# Altium PCB PCB_Byb2Aver2.PcbDoc
Units mm, origin at the board's own origin, x right, y up, seen from the top; angles counter-clockwise.
Board outline 125.25 x 82.75 mm, 2 copper layers (Top Layer, Bottom Layer), stack 2.071 mm thick; 73 components, 29 nets, 142 pads, 36 vias.
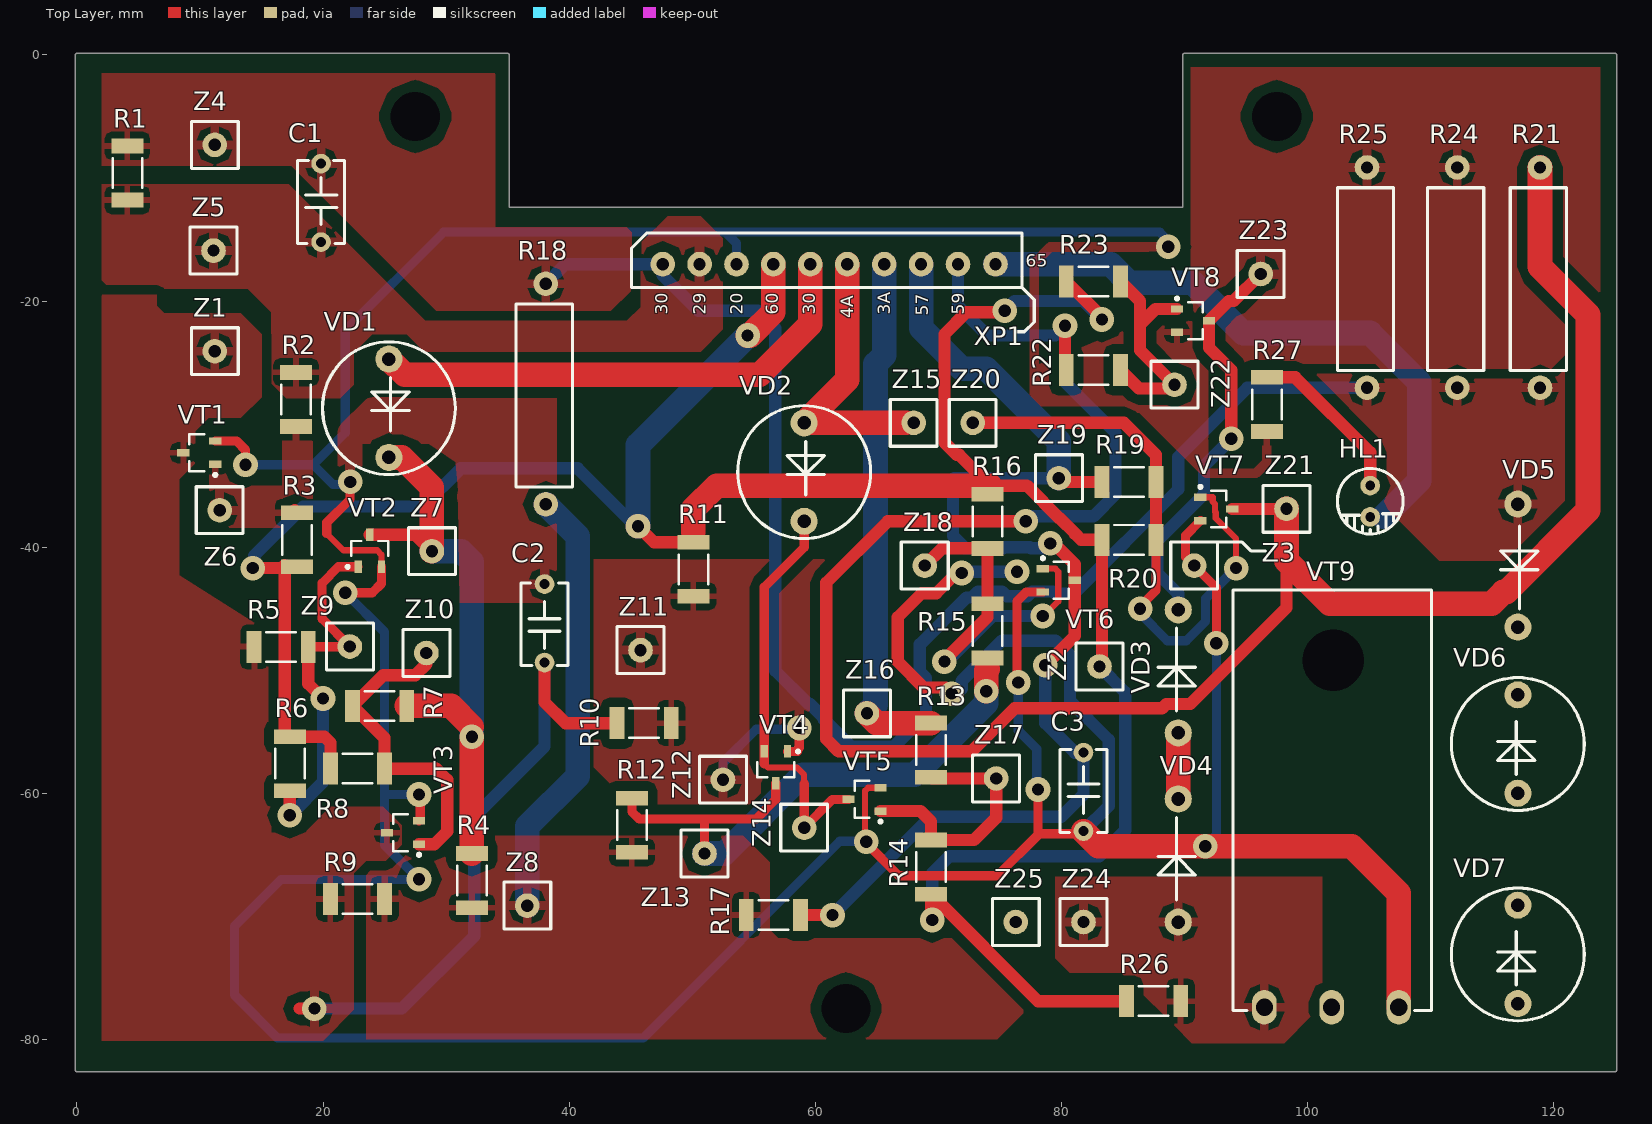
[diagram p0: Top Layer view]
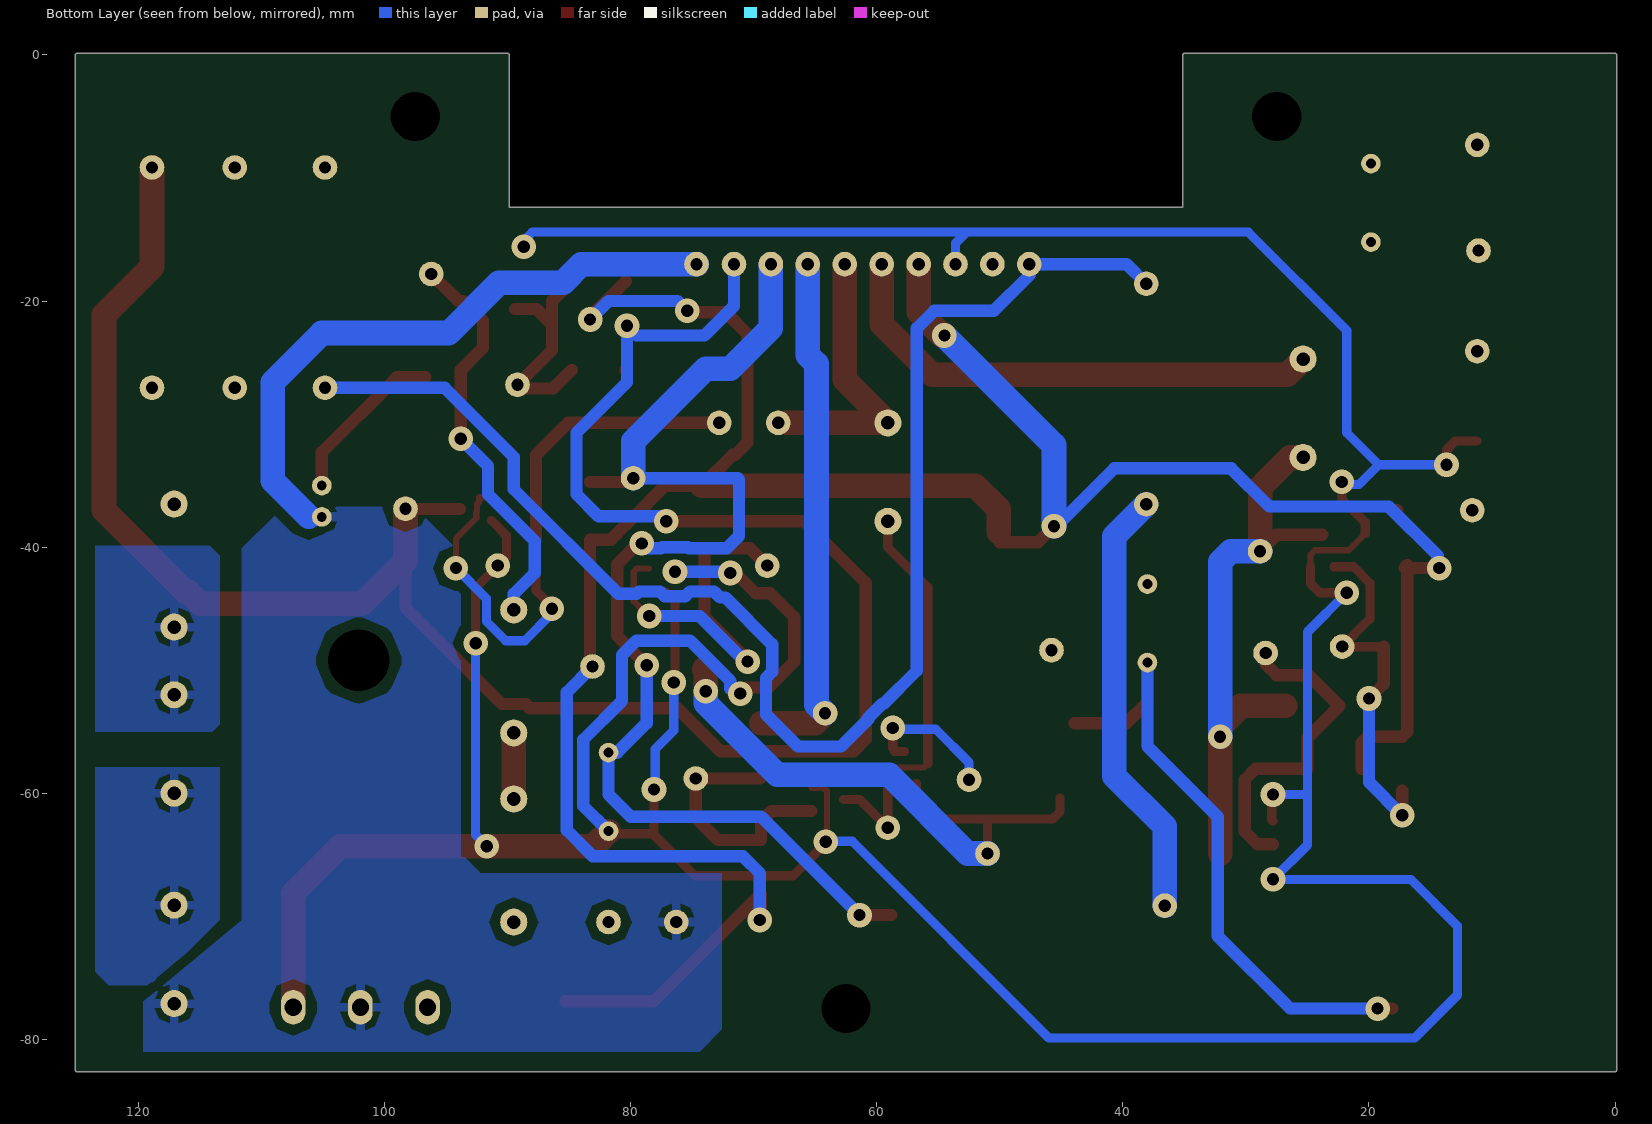
[diagram p1: Bottom Layer view, seen from below]
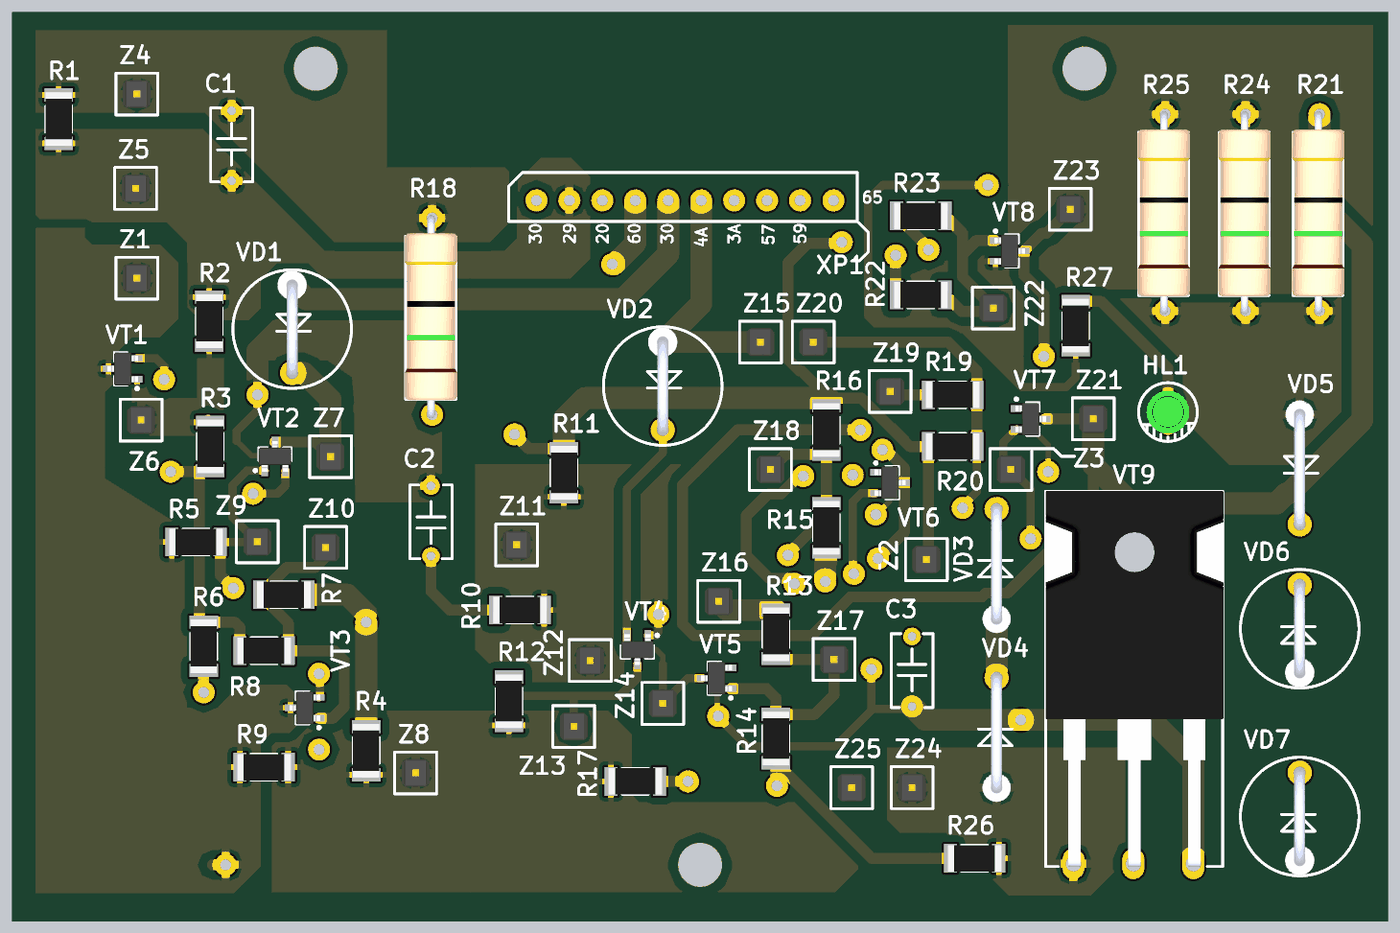
[diagram p2: 3D render of the assembled board from above, using the file's embedded part models]

## Layer stack, top to bottom
Top Solder: solder mask 0.0102, Solder Resist, Dk 3.5
Top Layer: signal copper 0.0356
Dielectric 1: dielectric 2, FR-4, Dk 4.8
Bottom Layer: signal copper 0.0356
Bottom Solder: solder mask 0.0102, Solder Resist, Dk 3.5

## Board outline
-0.117,-82.45 cw(c0,-82.4) -0.127,-82.4 -0.127,0 cw(c0,0) 0,0.127 35,0.127 cw(c35,0) 35.127,0 35.127,-12.373 89.873,-12.373 89.873,-0.001 cw(c90,0) 90,0.127 125,0.127 cw(c125,0) 125.127,0 125.127,-82.5 cw(c125,-82.5) 125,-82.627 0,-82.627 cw(c0,-82.5)

## Design rules (kind name [scope] priority, off if disabled: settings)
Clearance [All] p1: gap=0.5 ignorepadtopadclearanceinfootprint=FALSE except(0: Arc-Hole Track-Hole SMDPad-Hole THPad-Hole Via-Hole Fill-Hole Poly-Hole Region-Hole Text-Hole; 0.3: Arc-Track Arc-SMDPad Track-Track SMDPad-SMDPad; 0.75: Arc-THPad Arc-Poly Arc-Region Track-THPad Track-Poly Track-Region SMDPad-THPad SMDPad-Poly SMDPad-Region THPad-THPad THPad-Poly THPad-Region Via-Poly Via-Region Fill-Poly Fill-Region Poly-Poly Poly-Region Region-Region; 1: THPad-Via)
ComponentClearance [All] p1: gap=0.5 collisioncheckmode=3 verticalgap=0.5 showdistances=FALSE
PlaneClearance [All] p1: clearance=0.75
PlaneConnect [All] p1: planeconnectstyle=Relief reliefexpansion=0.75 reliefentries=4 reliefconductorwidth=0.5 reliefairgap=0.5
PolygonConnect [All] p1: thpad.connectstyle=Relief thpad.reliefconductorwidth=0.75 thpad.reliefentries=4 thpad.polygonreliefangle="90 Angle" thpad.airgapwidth=0.5 smdpad.connectstyle=Relief smdpad.reliefconductorwidth=0.5 smdpad.reliefentries=4 smdpad.polygonreliefangle="90 Angle" smdpad.airgapwidth=0.5 via.connectstyle=Relief via.reliefconductorwidth=0.75 via.reliefentries=4 via.polygonreliefangle="90 Angle" via.airgapwidth=0.5
RoutingVias [All] p1: holewidth=1 width=2 viastyle="Through Hole" minholewidth=1 minwidth=2 maxholewidth=1 maxwidth=2
SMDEntry [All] p1: side=TRUE corner=TRUE anyangle=TRUE
SMDToCorner [All] p1: distance=196850
SolderMaskExpansion [All] p1: expansion=0.2
Width [All] p1: maxlimit=4 minlimit=0.5 preferedwidth=2
27 further rules are at their usual default settings.

## Components (designator, comment, footprint, x,y, rotation, side; value= is the part's Value field where it differs from the comment)
C1 "Capasitor" CAPASITOR 19.844,-8.833 r270 top value=0.25uF
C2 "Capasitor" CAPASITOR 38,-49.38 r90 top value=0.25uF
C3 "Capasitor" CAPASITOR 81.8,-56.7 r270 top value=0.25uF
HL1 "Led" GNLR 105.1,-35 r270 top
R1 "Resistor_1/2W" RESC5025L 4.096,-9.595 r90 top value=470
R2 "Resistor_1/2W" RESC5025L 17.8,-28 r90 top value=1k2
R3 "Resistor_1/2W" RESC5025L 17.9,-39.4 r90 top value=680
R4 "Resistor_1/2W" RESC5025L 32.1,-67.1 r270 top value=820
R5 "Resistor_1/2W" RESC5025L 16.6,-48.1 r180 top value=820
R6 "Resistor_1/2W" RESC5025L 17.304,-57.601 r270 top value=3k9
R7 "Resistor_1/2W" RESC5025L 24.6,-52.9 r0 top value=820
R8 "Resistor_1/2W" RESC5025L 22.8,-58 r0 top value=3k9
R9 "Resistor_1/2W" RESC5025L 22.8,-68.6 r0 top value=820
R10 "Resistor_1/2W" RESC5025L 46.1,-54.3 r180 top value=820
R11 "Resistor_1/2W" RESC5025L 50.1,-41.8 r270 top value=3k9
R12 "Resistor_1/2W" RESC5025L 45.1,-62.6 r270 top value=820
R13 "Resistor_1/2W" RESC5025L 69.4,-56.5 r90 top value=820
R14 "Resistor_1/2W" RESC5025L 69.4,-66 r90 top value=3k9
R15 "Resistor_1/2W" RESC5025L 74,-46.8 r270 top value=820
R16 "Resistor_1/2W" RESC5025L 74,-37.9 r270 top value=3k9
R17 "Resistor_1/2W" RESC5025L 56.6,-69.9 r180 top value=820
R18 "Resistor_1/2W" RESISTOR_2W 38.227,-9.456 r270 top value=220
R19 "Resistor_1/2W" RESC5025L 85.5,-34.7 r180 top value=560
R20 "Resistor_1/2W" RESC5025L 85.5,-39.4 r0 top value=3k3
R21 "Resistor_1/2W" RESISTOR_2W 119.027,0 r270 top value=560
R22 "Resistor_1/2W" RESC5025L 82.6,-25.6 r180 top value=560
R23 "Resistor_1/2W" RESC5025L 82.6,-18.4 r0 top value=3k3
R24 "Resistor_1/2W" RESISTOR_2W 112.3,0 r270 top value=560
R25 "Resistor_1/2W" RESISTOR_2W 104.97,0 r270 top value=560
R26 "Resistor_1/2W" RESC5025L 87.5,-76.9 r0 top value=560
R27 "Resistor_1/2W" RESC5025L 96.7,-28.4 r90 top value=3k3
VD1 "Diode" DO-41-VERTICAL 25.356,-24.712 r270 top
VD2 "Diode" DO-41-VERTICAL 59.1,-29.9 r270 top
VD3 "Diode" DO-15-VERTICAL 89.5,-55.1 r90 top
VD4 "Diode" DO-15-VERTICAL 89.5,-70.468 r90 top
VD5 "Diode" DO-15-VERTICAL 117.1,-36.5 r270 top
VD6 "stabilizater" DO-41-VERTICAL 117.1,-60 r90 top
VD7 "stabilizater" DO-41-VERTICAL 117.1,-77.1 r90 top
VT1 "Bipolar Transistor" SOT95P270X110-3N 9.938,-32.328 r180 top
VT2 "Bipolar Transistor" SOT95P270X110-3N 23.8,-40.3 r90 top
VT3 "Bipolar Transistor" SOT95P270X110-3N 26.5,-63.2 r180 top
VT4 "Bipolar Transistor" SOT95P270X110-3N 56.8,-57.9 r270 top
VT5 "Bipolar Transistor" SOT95P270X110-3N 64,-60.5 r180 top
VT6 "Bipolar Transistor" SOT95P270X110-3N 79.8,-42.7 r0 top
VT7 "Bipolar Transistor" SOT95P270X110-3N 92.6,-36.9 r0 top
VT8 "Bipolar Transistor" SOT95P270X110-3N 90.7,-21.6 r0 top
VT9 "2sb688" TO-247-3 96.5,-77.4 r0 top
XP1 "Connector" CONNECTOR 47.6,-17 r0 top
Z1 "point_control" POINT_CONTROL 11.208,-24.073 r0 top
Z2 "point_control" POINT_CONTROL 83.1,-49.7 r0 top
Z3 "point_control" POINT_CONTROL 90.8,-41.5 r0 top
Z4 "point_control" POINT_CONTROL 11.208,-7.309 r0 top
Z5 "point_control" POINT_CONTROL 11.1,-15.9 r0 top
Z6 "point_control" POINT_CONTROL 11.6,-37 r0 top
Z7 "point_control" POINT_CONTROL 28.849,-40.332 r0 top
Z8 "point_control" POINT_CONTROL 36.6,-69.132 r0 top
Z9 "point_control" POINT_CONTROL 22.181,-48.079 r0 top
Z10 "point_control" POINT_CONTROL 28.4,-48.6 r0 top
Z11 "point_control" POINT_CONTROL 45.8,-48.368 r0 top
Z12 "point_control" POINT_CONTROL 52.5,-58.9 r0 top
Z13 "point_control" POINT_CONTROL 51,-64.9 r0 top
Z14 "point_control" POINT_CONTROL 59.1,-62.8 r0 top
Z15 "point_control" POINT_CONTROL 68,-29.9 r0 top
Z16 "point_control" POINT_CONTROL 64.2,-53.5 r0 top
Z17 "point_control" POINT_CONTROL 74.7,-58.8 r0 top
Z18 "point_control" POINT_CONTROL 68.9,-41.5 r0 top
Z19 "point_control" POINT_CONTROL 79.8,-34.4 r0 top
Z20 "point_control" POINT_CONTROL 72.8,-29.9 r0 top
Z21 "point_control" POINT_CONTROL 98.3,-36.882 r0 top
Z22 "point_control" POINT_CONTROL 89.2,-26.8 r0 top
Z23 "point_control" POINT_CONTROL 96.2,-17.8 r0 top
Z24 "point_control" POINT_CONTROL 81.8,-70.468 r0 top
Z25 "point_control" POINT_CONTROL 76.3,-70.468 r0 top

## Footprints (in the part's own frame and the unit in brackets; to place one, negate y for a bottom-side part, rotate by r counter-clockwise, add the part's x,y. Pads: shape width x height; smd on the part's side, far side on the other; paste and mask are expansions set on the pad)
CAPASITOR [mm]
  round 1.6 hole 0.8: 1(0,0) 2(6.38,0)
  silkscreen extent -0.25,-1.91 6.48,1.91, body extent -0.32,-2.93 6.58,2.98, height 7.17
CONNECTOR [mm]
  round 2 hole 1: 1(0,0) 2(3,0) 3(6,0) 4(9,0) 5(12,0) 6(15,0) 7(18,0) 8(21,0) 9(24,0) 10(27.051,0)
  silkscreen extent -2.54,-1.91 29.21,2.54
DO-15-VERTICAL [mm]
  round 2.2 hole 1.1: 1(0,0) 2(10,0)
  silkscreen extent 1.78,-1.4 8.51,1.65, body extent -1.3,-1.3 10.5,1.3, height 8.38
DO-41-VERTICAL [mm]
  round 2.2 hole 1.1: 1(0,0) 2(8,0)
  silkscreen extent -1.4,-5.4 9.4,5.4, body extent -1.35,-1.35 8.5,1.35, height 12.1
GNLR [mm]
  round 1.6 hole 0.8: 1(0,0) 2(2.54,0)
  silkscreen extent -1.4,-2.67 3.94,2.67, body extent -0.68,-1.95 3.22,1.95, height 8
POINT_CONTROL [mm]
  round 2 hole 1: 1(0,0)
  silkscreen extent -1.91,-1.91 1.91,1.91, body extent -1.27,-1.27 1.27,1.27, height 10
RESC5025L [mm] "Chip Resistor, Body 5.0x2.5mm, IPC High Density"
  rect 1.2x2.6 smd: 1(-2.2,0) 2(2.2,0)
  silkscreen extent -1.2,-1.2 1.2,1.2, body extent -2.45,-1.2 2.45,1.2, height 0.55
RESISTOR_2W [mm]
  round 2 hole 1: 1(9.144,-0.127) 2(27.051,-0.127)
  silkscreen extent 10.79,-2.54 25.65,2.03, body extent 8.89,-2.62 27.38,2.16, height 5.02
SOT95P270X110-3N [mm] "SOT23, 3-Leads, Body 2,95x2,70mm, Pitch 0,95mm, IPC Medium Density"
  rect 1x0.6 smd: 1(-1.3,-0.95) 2(-1.3,0.95) 3(1.3,0)
  silkscreen extent -1.43,-1.5 0.8,1.92, body extent -1.4,-1.5 1.4,1.5, height 1.1
TO-247-3 [mm]
  oval 2x2.8 hole 1.4: 1(0,0) 2(5.46,0) 3(10.92,0)
  silkscreen extent -2.54,-0.25 13.59,33.91, body extent -2.54,-0.25 13.66,33.95, height 5.5

## Part data
C2 C3: Voltage=160B, Marka=ELM
HL1: Color=Green, Marka=АЛ-203
R1 R18 R21 R24 R25: package=5020, Power=2W
  R1: Marka=RES2010
  R18 R21 R24 R25: Marka=R2010
R2 R3: Power=0.5W
R4 R5 R6 R7 R8 R9 R10 R11 R12: package=2010, Power=0.5W
  R4: Marka=R5025
  R5 R7: Marka=R5020
  R6: Marka=RE5020
  R8 R9 R10 R11 R12: Marka=RES5020
R13 R14 R15 R16 R17 R19 R20 R22 R23 R26 R27: package=5020, Power=0.5W, Marka=R2010
VD1 VD2 VD6 VD7: package=DO-41
  VD1 VD2: Marka=HER105
  VD6 VD7: Marka=BZx85
VD3 VD4 VD5: package=DO-15, Marka=SF-28
VT1: package=SoT-323, Marka=2SB1198
VT2 VT3: package=SOT-323, Marka=2SB1198
VT4 VT6 VT7 VT8: package=Sot-323, Marka=2SB1198
VT5: package=sot-323, Marka=2SB1198
VT9: package=TO-247, Marka=2SB688
C1: Marka=EMN1223

## Free pads (board coordinates)
  round 0 hole 4: 0(27.5,-5) 0(97.5,-5) 3(62.5,-77.5)
  round 0 hole 5: 0(102.1,-49.2)

## Via types
v1: diameter 2, hole 1, Top Layer to Bottom Layer, 36 vias

## Nets (pads, with @x,y where several pads share a name; then routed paths per layer and width w, separated by ;. In a path a pad name is that pad's centre, name@x,y a point inside that pad or via, vN(x,y) a via of type N, cw(c..) or ccw(c..) an arc to the next point about the centre after c; other vN are vias at no path point)
20: C2.2 C3.2 R27.1 VT1.1 VT2.1 VT3.1 VT5.1 VT6.1 VT7.1 VT8.1 VT9.3 XP1.3 Z3.1 | length 392.2
  Top Layer w0.5: 20.3,-38.9 21.65,-40.25 24.4,-40.25 24.75,-40.6 VT2.1 ; v1@64.1,-64 64.05,-63.95 64.05,-59.8 64.3,-59.55 VT5.1
  Top Layer w0.75: VT1.1 12.978,-31.378 13.7,-32.1 v1(13.7,-33.3) ; 20.3,-38.9 20.3,-38 22.2,-36.1 v1(22.2,-34.7) ; v1@22.151,-43.349 v1(21.8,-43.7) 24,-43.7 24.75,-42.95 VT2.1 ; VT3.1 27.9,-62.15 27.9,-60 v1(27.8,-60.1) ; v1@64.05,-63.95 v1(64.15,-63.95) ; v1@64.1,-64 66.8,-66.7 74.8,-66.7 78.15,-63.35 78.1,-63.3 ; v1(76.5,-51) 76.4,-50.9 76.4,-44.4 77.15,-43.65 VT6.1 ; v1(78.1,-59.7) 78.1,-63.3 ; C3.2 81.58,-63.3 78.1,-63.3 ; VT7.1 90.1,-39.05 90.1,-40.8 Z3.1 92.6,-43.3 v1(92.6,-47.8) ; v1(91.7,-64.3) v1@91.8,-64.3
  Top Layer w1: v1(71.1,-51.9) 70.6,-51.4 68.8,-51.4 66.7,-49.3 66.7,-45.7 68.65,-43.75 69.832,-43.75 71.382,-42.2 71.6,-42.2 71.7,-42.1 v1(71.9,-42.1) ; v1(76.4,-42) v1@76.65,-41.75
  Top Layer w2: C3.2 83.02,-64.3 v1(91.7,-64.3) ; v1@91.8,-64.3 103.6,-64.3 107.42,-68.12 VT9.3
  Bottom Layer w0.75: v1(13.7,-33.3) 19.2,-33.3 ; v1(21.8,-43.7) 25,-46.9 25,-60.1 ; v1(22.2,-34.7) 22.4,-34.9 20.8,-34.9 19.2,-33.3 ; v1(27.8,-60.1) 25,-60.1 ; XP1.3 53.6,-15.3 52.7,-14.4 ; v1(64.15,-63.95) 64.2,-63.9 62,-63.9 46,-79.9 16.3,-79.9 12.8,-76.4 12.8,-70.8 16.6,-67 v1(27.8,-67) 25,-64.2 25,-60.1 ; v1(76.5,-51) 76.5,-54.9 78,-56.4 78,-59.6 v1(78.1,-59.7) ; v1(88.7,-15.6) 89.2,-15.6 88,-14.4 52.7,-14.4 ; v1(91.7,-64.3) 92.6,-63.4 v1(92.6,-47.8) ; 19.2,-33.3 21.8,-30.7 21.8,-22.4 29.8,-14.4 52.7,-14.4
  Bottom Layer w1: v1(71.1,-51.9) 71.5,-51.9 71.9,-51.5 71.9,-50.872 75.172,-47.6 79.528,-47.6 80.7,-48.772 80.7,-52.5 83.85,-55.65 83.85,-61.03 C3.2 ; v1(71.9,-42.1) 72.2,-41.8 72.4,-42 v1(76.4,-42)
29: C1.2 R1.1 R2.2 XP1.2 Z5.1
30: C1.1 R1.2 R18.1 R21.2 R24.2 R25.2 VD5.1 XP1.1 Z4.1 | length 118.7
  Bottom Layer w1: R18.1 39.7,-17 XP1.1 47.6,-17.9 50.5,-20.8 55.328,-20.8 56.75,-22.222 56.75,-50.05 59.4,-52.7 59.528,-52.7 60.7,-53.872 60.7,-54 62.9,-56.2 66.4,-56.2 69,-53.6 69,-50.628 68.5,-50.128 68.5,-47.9 72.3,-44.1 72.728,-44.1 73.229,-43.6 75.171,-43.6 75.571,-44 77.228,-44 77.628,-43.6 79.328,-43.6 79.528,-43.8 81,-43.8 89.5,-35.3 89.5,-32.672 95.121,-27.051 R25.2
40: R4.2 R9.2 R12.2 R17.2 R18.2 Z8.1 | length 35.4
  Bottom Layer w2: Z8.1 36.6,-62.7 40.693,-58.607 40.693,-39.1 R18.2
45: R2.1 R3.2 VT1.2 Z6.1 | length 0.8
  Top Layer w1: Z6.1@11.238,-36.638 Z6.1 ; R3.2@17.7,-37 R3.2
46: R5.1 R6.2 VT2.2 Z9.1 | length 30.3
  Top Layer w0.75: R5.1 22.16,-48.1 Z9.1 19.925,-45.823 19.925,-42.923 21.248,-41.6 VT2.2
  Top Layer w1: v1(17.304,-61.796) R6.2 ; R5.1 18.8,-51.1 v1(20,-52.3)
  Bottom Layer w1: v1(17.304,-61.796) 20,-59.1 v1(20,-52.3)
47: R4.1 R7.2 VD1.2 VT2.3 Z7.1 | length 48.6
  Top Layer w1: VT2.3 27.517,-39 Z7.1
  Top Layer w2: VD1.2 26.412,-32.712 28.849,-35.149 Z7.1 ; R7.2 30.4,-52.9 v1@32.1,-54.6 ; R4.1 v1(32.1,-55.4)
  Bottom Layer w2: Z7.1 31.232,-40.332 32.1,-41.2 v1(32.1,-55.4)
48: R7.1 R8.2 VT3.2 Z10.1 | length 26.9
  Top Layer w1: VT3.2 29.05,-64.15 30.1,-63.1 30.1,-58.9 29.2,-58 R8.2 25,-55.5 R7.1 24.9,-50.4 27.5,-50.4 28.4,-49.5 Z10.1
50: C2.1 R5.2 R9.1 R10.2 VT1.3 VT3.3 Z1.1 | length 51
  Top Layer w1: 18.1,-77.5 v1(19.3,-77.5) ; C2.1 38,-52.6 39.7,-54.3 R10.2
  Bottom Layer w1: v1(19.3,-77.5) 26.4,-77.5 32.3,-71.6 32.3,-61.9 38,-56.2 C2.1
51: R10.1 R11.2 VT4.2 Z11.1 Z12.1 | length 11.5
  Top Layer w0.75: VT4.2 58.55,-56.6 58.55,-56.45 58.7,-56.3 v1(58.7,-54.7)
  Bottom Layer w0.75: Z12.1 52.5,-57.5 55.2,-54.8 58.6,-54.8 v1(58.7,-54.7)
52: VD2.2 VT4.1 VT5.3 Z14.1 | length 33.5
  Top Layer w0.5: 55.85,-57.6 56.15,-57.9 58.5,-57.9 59.1,-58.5 59.1,-59.238
  Top Layer w0.75: 55.85,-57.6 VT4.1 55.85,-43.25 59.1,-40 VD2.2 ; 59.1,-59.238 Z14.1 61.4,-60.5 VT5.3
53: R12.1 R15.2 VT4.3 Z13.1 | length 48.6
  Top Layer w0.75: R12.1 45.1,-61.5 45.7,-62.1 50.9,-62.1 ; Z13.1 51,-62.2 50.9,-62.1 ; VT4.3 56.8,-60.5 55.2,-62.1 50.9,-62.1
  Top Layer w2: v1(73.9,-51.7) 73.9,-50 74,-49.9
  Bottom Layer w2: Z13.1 52.6,-64.9 59,-58.5 68.1,-58.5 73.9,-52.7 v1(73.9,-51.7)
56: R15.1 R16.2 VT6.2 Z18.1 | length 31.4
  Top Layer w0.5: v1(78.5,-45.6) 78.561,-45.6 79.75,-44.411 79.75,-42 79.5,-41.75 VT6.2
  Top Layer w1: Z18.1 70.3,-40.1 R16.2 R15.1 74,-45.686 70.5,-49.186 v1(70.5,-49.3)
  Bottom Layer w1: v1(70.5,-49.3) 70.7,-49.3 74.4,-45.6 v1(78.5,-45.6)
57: C3.1 R17.1 R19.2 VT6.3 XP1.8 Z19.1 | length 100
  Top Layer w1: R17.1 v1(61.4,-69.9) ; v1(78.7,-49.6) 81.1,-47.2 VT6.3 81.1,-41.4 79.4,-39.7 v1(79.1,-39.7) ; Z19.1 80.1,-34.7 R19.2
  Bottom Layer w1: v1(61.4,-69.9) 69.4,-61.9 80,-61.9 81.8,-60.1 C3.1 81.1,-56.7 78.7,-54.3 v1(78.7,-49.6) ; v1(79.1,-39.7) 79.1,-40.1 77.528,-40.1 77.428,-40 75.372,-40 75.272,-40.1 72.2,-40.1 71.2,-39.1 71.2,-34.5 71.3,-34.4 Z19.1
  Bottom Layer w2: XP1.8 68.6,-22.2 71.9,-25.5 73.9,-25.5 79.8,-31.4 Z19.1
58: R19.1 R20.2 VT7.2 Z20.1 | length 49.2
  Top Layer w0.5: VT7.2 92.3,-35.95 92.3,-36.3 92.5,-36.5 92.5,-37.139 92.55,-37.189 92.55,-37.65 94.2,-39.3 v1(94.2,-41.7)
  Top Layer w0.75: v1(86.4,-45) 86.4,-44.8 87.7,-43.5 R20.2
  Top Layer w1: Z20.1 85.1,-29.9 87.7,-32.5 R19.1 R20.2
  Bottom Layer w0.75: v1(86.4,-45) 86.4,-45.4 88.6,-47.6 90.147,-47.6 91.725,-46.022 91.725,-44.175 v1(94.2,-41.7)
59: R21.1 R22.2 VT7.3 XP1.9 Z21.1 | length 185.3
  Top Layer w1: v1(77.1,-37.9) 65.9,-37.9 60.9,-42.9 60.9,-55.6 61.9,-56.6 72.7,-56.6 76.2,-53.1 88.177,-53.1 88.527,-52.75 90.478,-52.75 98.3,-44.928 98.3,-41.1 ; v1(80.3,-22) 80.3,-25.5 R22.2 ; VT7.3 98.282,-36.9 Z21.1
  Top Layer w2: Z21.1 98.3,-41.1 101.8,-44.6 114.969,-44.6 115.919,-43.65 116.15,-43.65 122.8,-37 122.8,-21.1 118.9,-17.2 R21.1
  Bottom Layer w1: XP1.9 71.6,-20.4 74,-22.8 79.5,-22.8 v1(80.3,-22) 80.3,-26.6 84.4,-30.7 84.4,-35.7 82.6,-37.5 77.5,-37.5 v1(77.1,-37.9)
60: R3.1 R6.1 R8.1 R11.1 R14.1 R16.1 R20.1 R23.1 R26.1 XP1.4 Z2.1 | length 228.5
  Top Layer w1: v1(14.3,-41.7) R3.1@16.9,-41.7 ; R8.1 20.6,-55.9 20.101,-55.401 R6.1 16.9,-54.997 R3.1@16.9,-41.7 ; v1(45.6,-38.3) 46.9,-39.6 R11.1@50,-39.6 ; v1(69.5,-70.3) 69.4,-70.2 R14.1 78.1,-76.9 R26.1 ; v1(75.4,-20.8) 75.3,-20.9 72.3,-20.9 70.5,-22.7 70.5,-31.5 71.5,-32.5 71.7,-32.5 74.2,-35 77.2,-35 79.9,-37.7 79.928,-37.7 81.1,-38.871 81.1,-38.9 81.6,-39.4 R20.1 83.3,-49.5 Z2.1 ; R23.1 83.3,-21.3 v1(83.3,-21.5) ; R3.1@16.9,-41.7 17.117,-41.7 16.9,-41.483 R3.1@16.9,-41.7
  Top Layer w2: 50.1,-38.8 50.1,-36.9 52,-35 74.2,-35 ; v1(54.5,-22.8) 54.7,-22.8 56.6,-20.9 XP1.4
  Bottom Layer w1: v1(14.3,-41.7) 14.4,-41.6 14.4,-40.7 18.4,-36.7 28.1,-36.7 31.2,-33.6 40.7,-33.6 45.4,-38.3 v1(45.6,-38.3) ; v1(69.5,-70.3) 69.5,-66.5 70.87,-65.13 83.07,-65.13 85.2,-63 85.2,-51.8 Z2.1 ; v1(75.4,-20.8) 76.2,-20 81.8,-20 v1(83.3,-21.5)
  Bottom Layer w2: v1(45.6,-38.3) 45.6,-31.7 v1(54.5,-22.8)
61: R22.1 R23.2 VT8.2 Z22.1 | length 18.9
  Top Layer w1: R22.1 86.3,-27.1 88.9,-27.1 Z22.1 86.4,-24 86.4,-21.9 ; R23.2 86.4,-20 86.4,-21.9 ; VT8.2 87.65,-20.65 86.4,-21.9
62: R24.1 R25.1 VD3.2 VT8.3 Z23.1 | length 33.2
  Top Layer w1: v1(93.8,-31.2) 93.8,-25.6 92,-23.8 VT8.3 93.6,-20 94,-20 Z23.1
  Bottom Layer w1: VD3.2 89.5,-43.8 87.8,-42.1 87.8,-39.5 91.6,-35.7 91.6,-33.4 v1(93.8,-31.2)
63: R26.2 VD4.1 VT9.1 Z24.1
65: HL1.2 VD7.1 VT9.2 XP1.10 Z25.1 | length 51.8
  Bottom Layer w1: HL1.2 106.166,-37.54 106.34,-37.54
  Bottom Layer w2: XP1.10 84,-17 85.5,-18.5 90.7,-18.5 94.8,-22.6 105.1,-22.6 109.1,-26.6 109.1,-34.606 106.166,-37.54
NetHL1_1: HL1.1 R27.2 | length 13.6
  Top Layer w1: R27.2 99,-26.2 105.1,-32.3 HL1.1
NetR13_1: R13.1 R14.2 VT5.2 Z17.1 | length 20.5
  Top Layer w1: VT5.2 68.55,-61.45 69.4,-62.3 R14.2 72.9,-63.8 74.7,-62 Z17.1 69.5,-58.8 R13.1
NetVD3_1: VD3.1 VD4.2 | length 5.4
  Top Layer w2: VD4.2 VD3.1
NetVD5_2: VD5.2 VD6.2
NetVD6_1: VD6.1 VD7.2
x7/2a: VD1.1 XP1.5 | length 41.4
  Top Layer w2: VD1.1 26.644,-26 55.5,-26 59.6,-21.9 XP1.5
x7/3a: R13.2 XP1.7 Z16.1 | length 42.6
  Top Layer w2: Z16.1 65,-54.3 R13.2
  Bottom Layer w2: Z16.1 64.9,-52.8 64.9,-25.1 65.6,-24.4 XP1.7
x7/4a: VD2.1 XP1.6 Z15.1 | length 22.6
  Top Layer w2: XP1.6 62.6,-26.4 VD2.1 Z15.1@67.4,-29.9

## Polygon pours and split planes (outlines as drawn)
50 on Top Layer "Top Overlay-No Net" (solid, remove dead copper, pour order 2): 6.5,-19.5 6.5,-20.4 7.1,-21 13.3,-21 15,-22.7 15,-27.8 13.3,-29.5 10.7,-29.5 9.6,-30.6 9.6,-33.2 8.3,-34.5 8.3,-42.3 15.8,-47 15.8,-63.2 18.5,-63.2 20.6,-61.1 24.9,-61.1 26.4,-62.6 26.4,-64.2 25.1,-65.5 23.5,-65.5 22.5,-66.5 22.5,-77.6 20,-80.1 2,-80.1 2,-19.6 1.9,-19.5
63 on Top Layer "Top Overlay-No Net" (solid, remove dead copper, pour order 14): 79.5,-66.8 79.5,-73.4 80.7,-74.6 84.9,-74.6 90.6,-80.3 98.1,-80.3 101.2,-77.2 101.2,-66.8
30 on Top Layer "Top Overlay-No Net" (solid, remove dead copper, pour order 32): 2,-9 17.4,-9 29.2,-20.8 43.4,-20.8 45,-19.2 45,-17.1 45.1,-17 45.1,-14.4 44.7,-14 34,-14 34,-1.6 34.1,-1.5 2,-1.5
29 on Top Layer "Top Overlay-No Net" (solid, remove dead copper, pour order 34): 2,-10.5 2,-18.3 2.7,-19 13.9,-19 15.8,-20.9 15.8,-26.7 17,-27.9 21.4,-27.9 22.5,-26.8 22.5,-24.2 24,-22.7 26.8,-22.7 28.6,-24.5 50.3,-24.5 52.5,-22.3 52.5,-14.9 50.7,-13.1 48,-13.1 45.8,-15.3 45.8,-20.5 44.7,-21.6 28.3,-21.6 17.2,-10.5
45 on Top Layer "Top Overlay-No Net" (solid, remove dead copper, pour order 44): 10.91,-38.441 cw(c12.536,-37.432) 10.741,-36.769 cw(c11.359,-36.706) 10.738,-36.707 10.738,-33.278 cw(c11.238,-33.278) 11.738,-33.278 13.1,-35 16.7,-35 16.7,-31 cw(c17.926,-31) 19.151,-31 19.151,-37.7 cw(c18.288,-37.732) 17.796,-38.441
40 on Top Layer "Top Overlay-No Net" (solid, remove dead copper, pour order 10): 23.5,-66.5 23.5,-80 74.8,-80 76.9,-77.9 76.9,-73.2 75.5,-71.8 57,-71.8 56.3,-71.1 56.3,-65.6 54.15,-63.45 26.4,-63.45
51 on Top Layer "Top Overlay-No Net" (solid, remove dead copper, pour order 8): 42,-41 42,-57.9 45.4,-61.3 57.4,-61.3 61.3,-57.4 61.3,-41
62 on Top Layer "Top Overlay-No Net" (solid, remove dead copper, pour order 6): 90.5,-20 92.2,-25.1 105.5,-25.1 105.9,-25.5 119.8,-25.5 123.8,-21.5 123.8,-1 90.5,-1
30 on Top Layer "Top Overlay-No Net" (solid, remove dead copper, pour order 18): 98.7,-26.6 98.7,-29.1 110.7,-41.1 120.5,-41.1 120.5,-40.7 124,-37.2 124,-26.6 122.3,-24.9 99.7,-24.9
20 on Top Layer "Top Overlay-No Net" (solid, remove dead copper, pour order 42): 23.2,-34.7 23.2,-31.593 28.6,-31.593 30.8,-33.1 31,-35.4 ccw(c32.207,-35.9) 31,-36.4 31.1,-44.5 38.933,-44.5 ccw(c38.967,-44.475) 39,-44.45 39,-32.3 39,-27.8 3865.109,-27.859 3440.364,-27.983 24.1,-27.8 ccw(c24.099,-28.799) 23.393,-28.093 21.493,-29.993 ccw(c22.199,-30.7) 21.2,-30.7 21.2,-34.7 ccw(c22.2,-34.7)
20 on Top Layer "Top Overlay-No Net" (solid, remove dead copper, pour order 50): 77.535,-27.765 78.735,-28.965 ccw(c79,-28.7) 79,-29.075 86.345,-29.075 91.535,-34.265 ccw(c91.8,-34) 91.8,-34.375 95.8,-34.375 ccw(c95.8,-34) 96.065,-34.265 96.965,-33.365 ccw(c96.7,-33.1) 97.075,-33.1 97.075,-30.6 ccw(c96.7,-30.6) 96.325,-30.6 96.325,-32.945 95.645,-33.625 91.955,-33.625 91.955,-19.682 78.175,-25.126 78.175,-17.055 79.255,-15.975 88.7,-15.975 ccw(c88.7,-15.6) 89.075,-15.6 ccw(c88.7,-15.6) 88.7,-15.225 79.1,-15.225 ccw(c79.1,-15.6) 78.835,-15.335 77.535,-16.635 ccw(c77.8,-16.9) 77.425,-16.9 77.425,-27.5 ccw(c77.8,-27.5)
65 on Bottom Layer "Top Overlay-No Net" (solid, remove dead copper, pour order 16): 72.6,-66.5 72.6,-79.2 74.4,-81 102.9,-81 119.6,-81 119.6,-76.925 111.6,-70.325 111.6,-40.1 108.2,-36.7 97.6,-36.7 93.8,-40.5 93.8,-65.2 93.5,-65.2 92.2,-66.5
NetVD6_1 on Bottom Layer "Top Overlay-No Net" (solid, remove dead copper, pour order 26): 113.4,-57.9 113.4,-70.3 118.7,-75.6 122.4,-75.6 123.5,-74.5 123.5,-57.9
NetVD5_2 on Bottom Layer "Top Overlay-No Net" (solid, remove dead copper, pour order 28): 123.5,-55 114,-55 113.4,-54.4 113.4,-40.7 114.2,-39.9 123.5,-39.9
65 on Bottom Layer "Top Overlay-No Net" (solid, remove dead copper, pour order 43): 100.9,-40.9 100.9,-39 cw(c101.4,-39) 101.046,-38.646 102.506,-37.186 ccw(c102.86,-37.54) 102.506,-37.186 cw(c102.86,-37.54) 102.86,-37.04 105.1,-37.04 cw(c105.1,-37.54) 105.6,-37.54 cw(c105.1,-37.54) 105.1,-38.04 103.067,-38.04 101.9,-39.207 101.9,-40.9 cw(c101.4,-40.9)

## Silkscreen, mask and mechanical layers (free items; w line width, h text height)
Top Overlay:
  lines w0.254: 76.3,-22.5 77,-22.5 77.8,-21.7 77.8,-19.9 76.81,-18.91 76.81,-18.905 ; 92.705,-39.595 94.695,-39.595 95.4,-40.3 96.6,-40.3
  text "65" at 77.1,-17.2 h1
  text "30" at 48,-21.1 h1 r90
  text "29" at 51.1,-21.1 h1 r90
  text "20" at 54.1,-21.1 h1 r90
  text "60" at 57,-21.1 h1 r90
  text "30" at 60,-21.1 h1 r90
  text "3A" at 66.1,-21.1 h1 r90
  text "59" at 72.1,-21.1 h1 r90
  text "57" at 69.2,-21.2 h1 r90
  text "4A" at 63.1,-21.4 h1 r90
Mechanical 1:
  lines w0.254: 0,-82.5 125,-82.5 125,0 90,0 ; 0,-82.4 0,0 35,0 35,-12.5 90,-12.5 90,0 ; 90,0 90,0

## Dimensions
62.5,-77.5 to 0,-85.9 on Mechanical 1
0,-82.5 to 125,-82.5 on Mechanical 1
97.5,-5 to 90,0 on Mechanical 1
27.5,-5 to 35,0 on Mechanical 1